# Altium PCB Expansion board.PcbDoc
Units mil, origin at the board's own origin, x right, y up, seen from the top; angles counter-clockwise.
Board outline 3543.31 x 2165.35 mil, 2 copper layers (Top Layer, Bottom Layer); 52 components, 96 nets, 335 pads, 0 vias.
Unrouted connection lines stored in the file: 232.
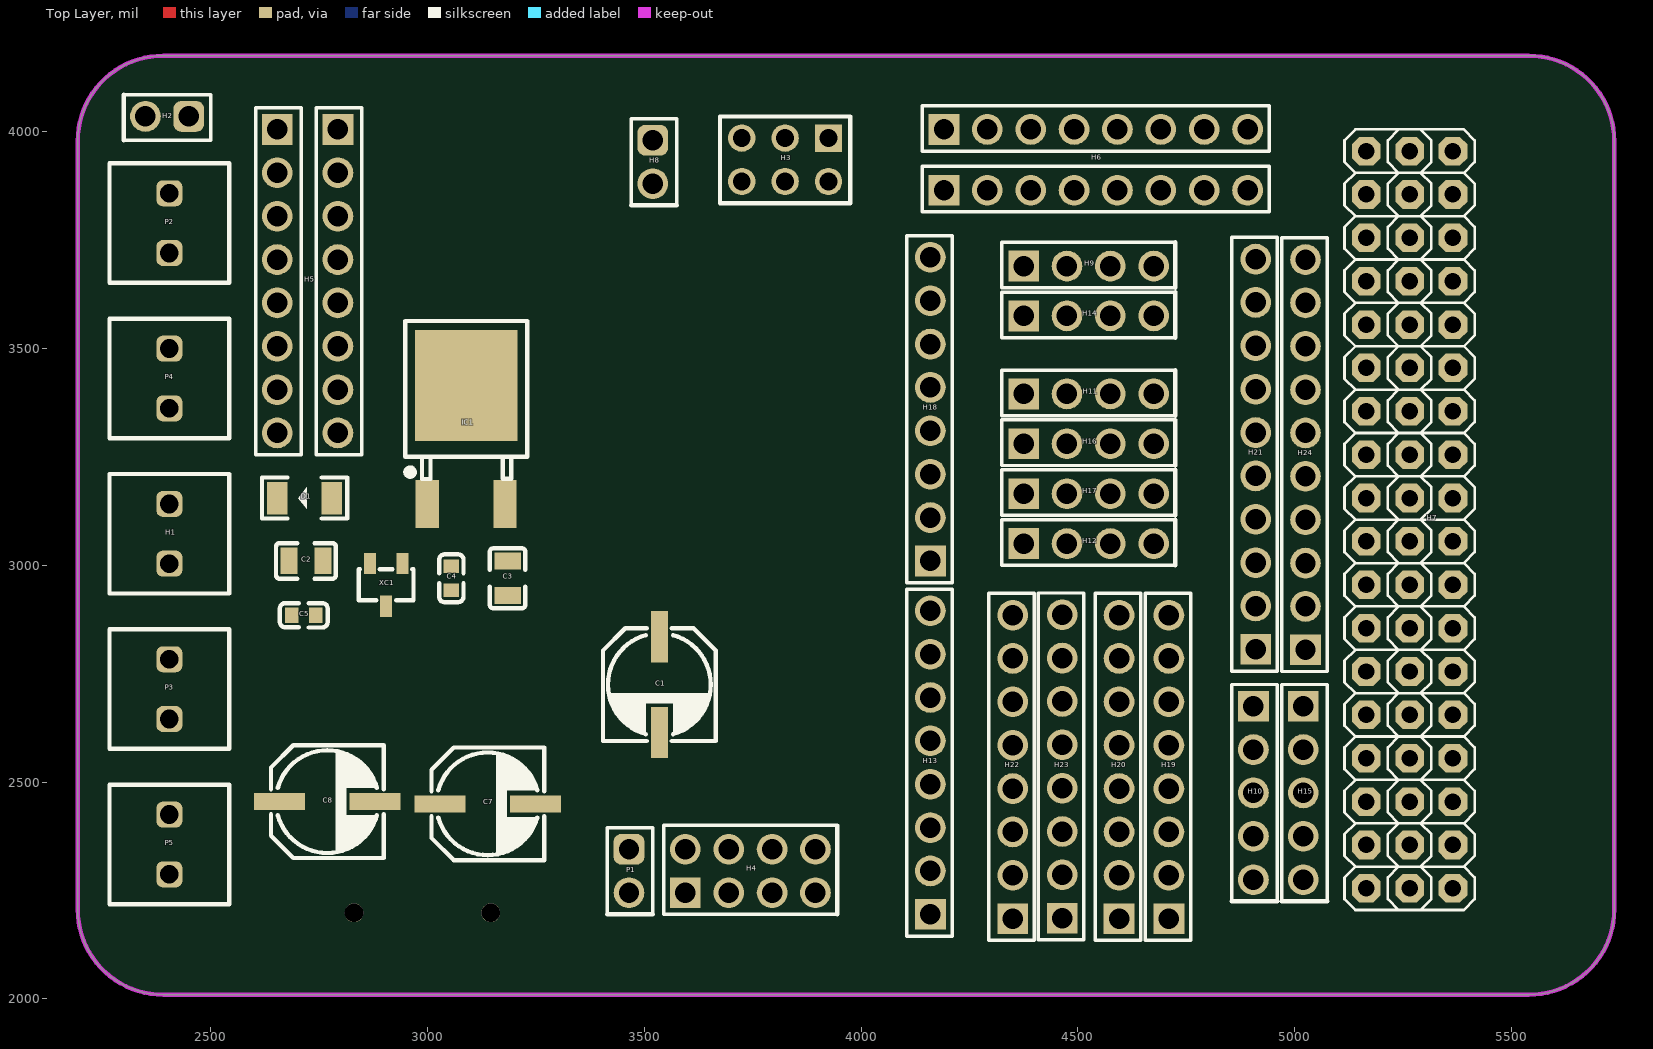
[diagram p0: Top Layer view]
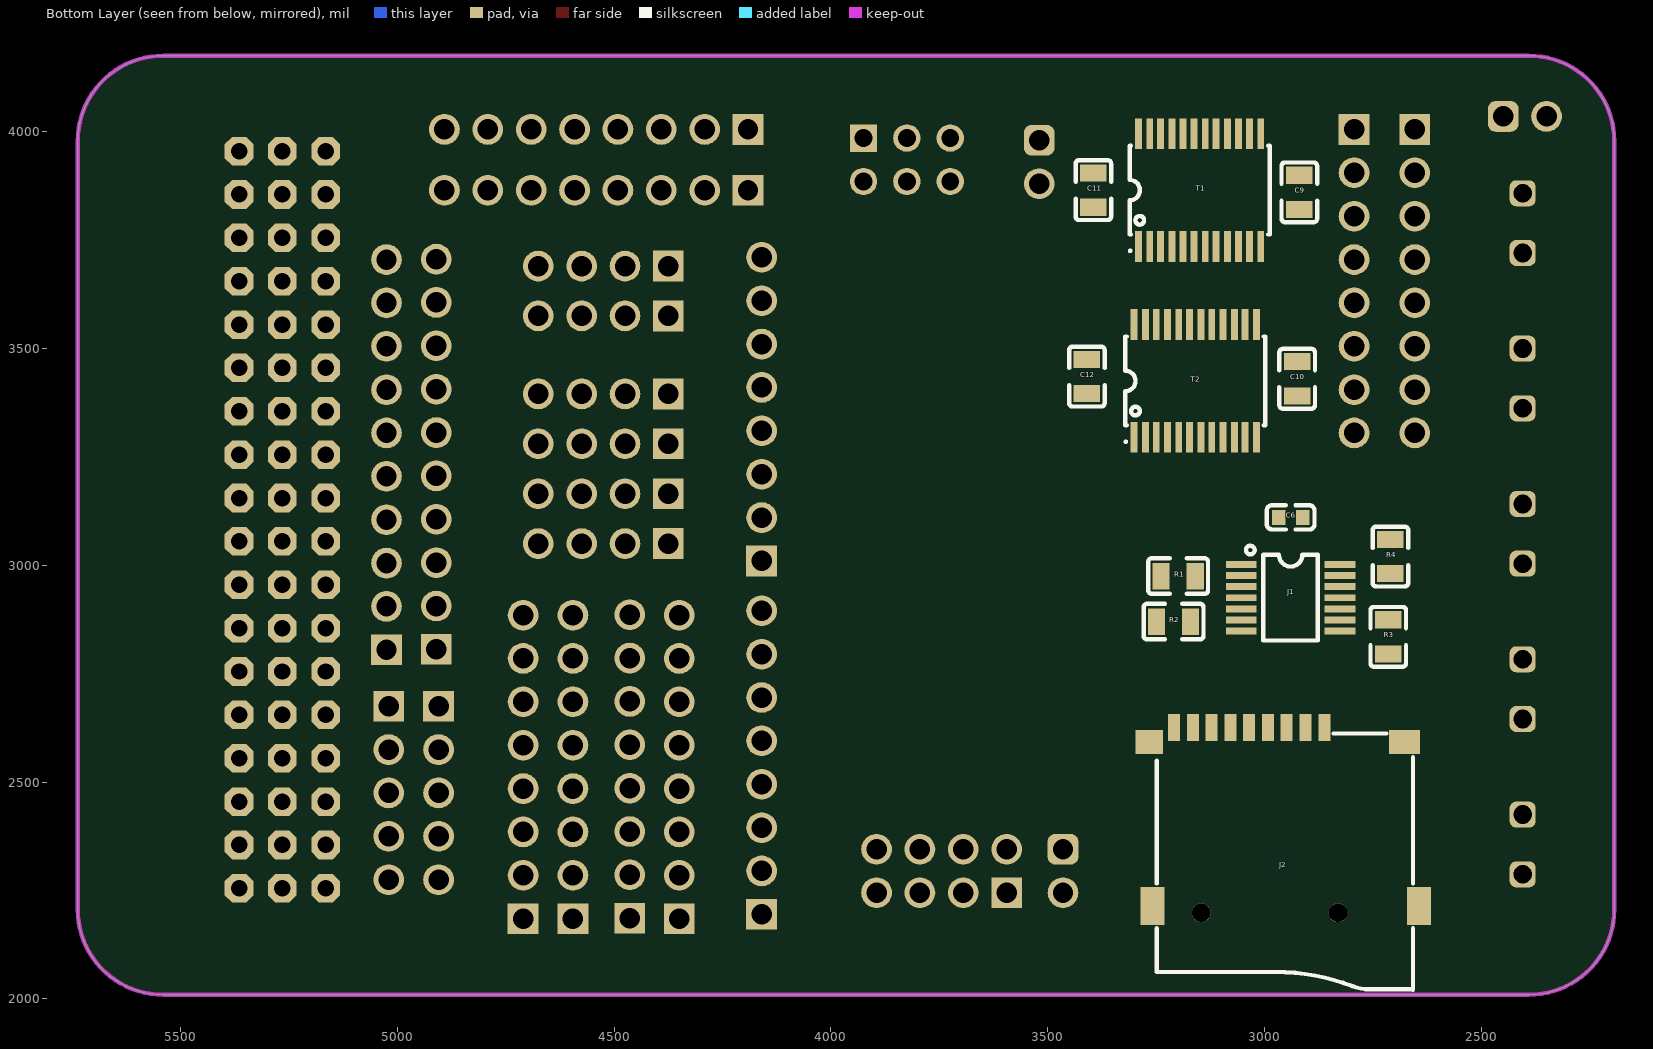
[diagram p1: Bottom Layer view, seen from below]

## Layer stack, top to bottom
Top Solder: solder mask 0.4, Solder Resist, Dk 3.5
Top Layer: signal copper 1.4
Dielectric 1: dielectric 12.6, FR-4, Dk 4.8
Bottom Layer: signal copper 1.4
Bottom Solder: solder mask 0.4, Solder Resist, Dk 3.5

## Board outline
2193.74,2206.47 2193.74,3978.12 cw(c2390.59,3978.12) 2390.59,4174.97 5540.2,4174.97 cw(c5540.2,3978.12) 5737.05,3978.12 5737.05,2206.47 cw(c5540.2,2206.47) 5540.2,2009.62 2390.59,2009.62 cw(c2390.59,2206.47)

## Design rules (kind name [scope] priority, off if disabled: settings)
Clearance [All] p1: gap=5.5 ignorepadtopadclearanceinfootprint=FALSE
PolygonConnect [All] p1: connectstyle=Relief reliefconductorwidth=10 reliefentries=4 polygonreliefangle="90 Angle" airgapwidth=10
RoutingVias [All] p1: holewidth=28 width=50 viastyle="Through Hole" minholewidth=28 minwidth=50 maxholewidth=28 maxwidth=50
SolderMaskExpansion [All] p1: expansion=4 istentingtop=FALSE
Width [All] p1: maxlimit=10 minlimit=10 preferedwidth=10
30 further rules are at their usual default settings.

## Classes and differential pairs
net class PWR: +3V3 +5V GND VIN VIN-B VM

## Components (designator, comment, footprint, x,y, rotation, side; value= is the part's Value field where it differs from the comment)
C1 "47uF" 极性电容 3530.1,2729.05 r270 top
C2 "330nF" 0805 2720,3010 r0 top
C3 "100nF" 0805 3185,2970 r90 top
C4 "1uF" 0603 3055,2970 r270 top
C5 "1uF" 0603 2715,2885 r180 top
C6 "100nF 0603" 0603 2940,3110 r180 bottom
C7 "22uF 25V" 极性电容 3135,2445 r0 top
C8 "22uF 25V" 极性电容 2765,2450 r0 top
C9 "100nF(104) ±10% 50V" 0805 2920,3860 r270 bottom
C10 "100nF(104) ±10% 50V" 0805 2925,3430 r270 bottom
C11 "100nF(104) ±10% 50V" 0805 3395,3865 r90 bottom
C12 "100nF(104) ±10% 50V" 0805 3410,3435 r270 bottom
D1 "二极管" "1206 +-" 2717.01,3155 r180 top
H1 "PWR" 插线端子2P 2405,3141.4 r270 top
H2 "插针" H2 2450,4035 r180 top
H3 "ICSP" H2*3 3825,3935 r180 top
H4 "NRF24l01" H2*4 3745,2295 r90 top
H5 "J2 J3" J2J3 2653.74,4005 r0 top locked
H6 "J5 J4" J5J4 4541.38,3935 r0 top locked
H7 "H3*18" H3*18 5265,3105 r0 top locked
H8 "插针" H2 3520,3980 r270 top
H9 "BT/WIFI" H4 4525,3690 r0 top
H10 "SPI-1" H5 4905,2525 r270 top
H11 "I2C-1" H4 4525,3395 r0 top
H12 "I2C-3" H4 4525,3050 r0 top
H13 "HC-SR04-1" H8 4160,2545 r90 top
H14 "BT/WIFI" H4 4525,3575 r0 top
H15 "SPI-2" H5 5020,2525 r270 top
H16 "I2C-2" H4 4525,3280 r0 top
H17 "I2C-4" H4 4525,3165 r0 top
H18 "HC-SR04-2" H8 4160,3360 r90 top
H19 "模拟输入A0-A7 （8）" H8 4710,2535 r90 top
H20 "8-13+AREF （8）" H8 4595,2535 r90 top
H21 "22-31 (*) （10）" H10 4910,3256 r90 top
H22 "A8-A15 （8）" H8 4350,2535 r90 top
H23 "43-49 + 53 （8）" H8 4464,2536 r90 top
H24 "0-2 + 7 + 14-19 （10）" H10 5025,3255 r90 top
IC1 "78M05 MAX 35V" 78M05 3089.32,3278.19 r90 top
J1 "74VHC125MTC" 74VHC125MTC 2940,2925 r270 bottom
J2 "SD" SD 2955,2420 r270 bottom
P1 "TB6612电源排针" H2 3465,2345 r270 top
P2 "H2-P" 插线端子2P 2405,3857.8 r270 top
P3 "H2-P" 插线端子2P 2405,2783.2 r270 top
P4 "H2-P" 插线端子2P 2405,3499.6 r270 top
P5 "H2-P" 插线端子2P 2405,2425 r270 top
R1 "3.3K" 0805 3199.37,2975 r180 bottom
R2 "3.3K" 0805 3210,2870 r180 bottom
R3 "3.3K" 0805 2715,2835 r270 bottom
R4 "3.3K" 0805 2710,3020 r270 bottom
T1 "TB6612FNG1" TB6612GNG 3150,3865 r180 bottom
T2 "TB6612FNG2" TB6612GNG 3160,3425 r180 bottom
XC1 "XC6206P332" XC6206P332-3.3V 2905,2955 r90 top

## Footprints (in the part's own frame and the unit in brackets; to place one, negate y for a bottom-side part, rotate by r counter-clockwise, add the part's x,y. Pads: shape width x height; smd on the part's side, far side on the other; paste and mask are expansions set on the pad)
74VHC125MTC [mil]
  rect 16x71 smd: 1(-76.77,-114) 2(-51.18,-114) 3(-25.59,-114) 4(0,-114) 5(25.59,-114) 6(51.18,-114) 7(76.77,-114) 8(76.77,114) 9(51.18,114) 10(25.59,114) 11(0,114) 12(-25.59,114) 13(-51.18,114) 14(-76.77,114)
  silkscreen extent -120,-103 98,63, body extent -97,-125 100,127, height 41
78M05 [mm]
  rect 6.5x6 smd: 1(3.475,-0.017)
  rect 2.8x1.35 smd: 2(-3.475,2.275) 3(-3.475,-2.275)
  silkscreen extent -2.01,-3.59 7.24,3.56, body extent -3.76,-3.38 6.34,3.35, height 2.5
0603 [mm]
  rect 0.8x0.9 smd: 1(-0.7,0) 2(0.7,0)
  silkscreen extent -1.4,-0.7 1.4,0.72, body extent -0.8,-0.41 0.8,0.41, height 0.45
0805 [mm]
  rect 1x1.55 smd: 1(-1,0) 2(1,0)
  silkscreen extent -1.75,-1.04 1.75,1.04, body extent -1,-0.62 1,0.62, height 0.5
"1206 +-" [mm] "开关二极管"
  rect 1.2x1.9 smd: 1(1.6,0) 2(-1.6,0)
  silkscreen extent -2.5,-1.2 2.5,1.2, body extent -1.6,-0.8 1.6,0.8, height 0.55
H2 [mm]
  rrect50% 1.8x1.8 hole 1.2: 1(0,0)
  round 1.8 hole 1.2: 2(2.54,0)
  silkscreen extent -1.27,-1.27 3.81,1.4, body extent -1.27,-1.27 3.81,1.27, height 8.54
H2*3 [mm]
  rect 1.6x1.6 hole 1.05: 1(-2.54,-1.27)
  round 1.6 hole 1.05: 2(-2.54,1.27) 3(0,-1.27) 4(0,1.27) 5(2.54,-1.27) 6(2.54,1.27)
  silkscreen extent -3.81,-2.54 3.81,2.54, body extent -3.81,-2.54 3.81,2.54, height 8.54
H2*4 [mm] "NRF24L01"
  rect 1.8x1.8 hole 1.2: 1(-1.27,3.81)
  round 1.8 hole 1.2: 2(1.27,3.81) 3(-1.27,1.27) 4(1.27,1.27) 5(-1.27,-1.27) 6(1.27,-1.27) 7(-1.27,-3.81) 8(1.27,-3.81)
  silkscreen extent -2.54,-5.08 2.67,5.08, body extent -2.54,-5.08 2.54,5.08, height 8.54
H3*18 [mil]
  oct 66x66 hole 38: 1(-100,850) 2(0,850) 3(-100,750) 4(0,750) 5(-100,650) 6(0,650) 7(-100,550) 8(0,550) 9(-100,450) 10(0,450) 11(-100,350) 12(0,350) 13(-100,250) 14(0,250) 15(-100,150) 16(0,150) 17(-100,50) 18(0,50) 19(-100,-50) 20(0,-50) 21(-100,-150) 22(0,-150) 23(-100,-250) 24(0,-250) 25(-100,-350) 26(0,-350) 27(-100,-450) 28(0,-450) 29(-100,-550) 30(0,-550) 31(-100,-650) 32(0,-650) 33(-100,-750) 34(0,-750) 35(-100,-850) 36(0,-850) 37(100,850) 38(100,750) 39(100,650) 40(100,550) 41(100,450) 42(100,350) 43(100,250) 44(100,150) 45(100,50) 46(100,-50) 47(100,-150) 48(100,-250) 49(100,-350) 50(100,-450) 51(100,-550) 52(100,-650) 53(100,-750) 54(100,-850)
  silkscreen extent -150,-900 150,900, body extent -150,-900 150,900, height 336
H4 [mm]
  rect 1.8x1.8 hole 1.2: 1(-3.81,0)
  round 1.8 hole 1.2: 2(-1.27,0) 3(1.27,0) 4(3.81,0)
  silkscreen extent -5.08,-1.27 5.08,1.4, body extent -5.08,-1.27 5.08,1.27, height 8.54
H5 [mm]
  rect 1.8x1.8 hole 1.2: 1(-3.81,0)
  round 1.8 hole 1.2: 2(-1.27,0) 3(1.27,0) 4(3.81,0) 5(6.35,0)
  silkscreen extent -5.08,-1.27 7.62,1.4, body extent -5.08,-1.27 7.62,1.27, height 8.54
H8 [mm]
  rect 1.8x1.8 hole 1.2: 1(-8.89,0)
  round 1.8 hole 1.2: 2(-6.35,0) 3(-3.81,0) 4(-1.27,0) 5(1.27,0) 6(3.81,0) 7(6.35,0) 8(8.89,0)
  silkscreen extent -10.16,-1.27 10.16,1.4, body extent -10.16,-1.27 10.16,1.27, height 8.54
H10 [mm]
  rect 1.8x1.8 hole 1.2: 1(-11.43,0)
  round 1.8 hole 1.2: 2(-8.89,0) 3(-6.35,0) 4(-3.81,0) 5(-1.27,0) 6(1.27,0) 7(3.81,0) 8(6.35,0) 9(8.89,0) 10(11.43,0)
  silkscreen extent -12.7,-1.27 12.7,1.4, body extent -12.7,-1.27 12.7,1.27, height 8.54
J2J3 [mm]
  rect 1.8x1.8 hole 1.2: 1(0,0) 9(3.556,0)
  round 1.8 hole 1.2: 2(0,-2.54) 3(0,-5.08) 4(0,-7.62) 5(0,-10.16) 6(0,-12.7) 7(0,-15.24) 8(0,-17.78) 10(3.556,-2.54) 11(3.556,-5.08) 12(3.556,-7.62) 13(3.556,-10.16) 14(3.556,-12.7) 15(3.556,-15.24) 16(3.556,-17.78)
  silkscreen extent -1.27,-19.05 4.95,1.27, body extent -1.21,-19.05 4.95,1.27, height 8.54
J5J4 [mm]
  rect 1.8x1.8 hole 1.2: 17(-8.89,1.778) 25(-8.89,-1.778)
  round 1.8 hole 1.2: 18(-6.35,1.778) 19(-3.81,1.778) 20(-1.27,1.778) 21(1.27,1.778) 22(3.81,1.778) 23(6.35,1.778) 24(8.89,1.778) 26(-6.35,-1.778) 27(-3.81,-1.778) 28(-1.27,-1.778) 29(1.27,-1.778) 30(3.81,-1.778) 31(6.35,-1.778) 32(8.89,-1.778)
  silkscreen extent -10.16,-3.05 10.16,3.17, body extent -10.16,-3.05 10.16,3.05, height 8.54
SD [mil] "TF"
  rect 63x27.6 smd: 1(-205.77,92.52) 2(-205.77,49.21) 3(-205.77,5.91) 4(-205.77,-37.4) 5(-205.77,-80.71) 6(-205.77,-124.01) 7(-205.77,-167.32) 8(-205.77,-210.63) 9(-205.77,-253.94)
  rect 55.1x63 smd: 10(-172.19,-311.02)
  rect 86.6x55.1 smd: 11(205.77,-303.15) 12(205.77,311.02)
  rect 55.1x70.9 smd: 13(-172.17,277.58)
  round 43.31 hole 43.31 unplated: ""(221.51,-190.94) ""(221.51,124.02)
  silkscreen extent -192,-294 399,297, body extent -210,-310 471,324, height 73
TB6612GNG [mil]
  rect 16x71 smd: 1(-141,-129.92) 2(-115,-129.92) 3(-90,-129.92) 4(-64,-129.92) 5(-38,-129.92) 6(-13,-129.92) 7(13,-129.92) 8(38,-129.92) 9(64,-129.92) 10(90,-129.92) 11(115,-129.92) 12(141,-129.92) 13(141,129.92) 14(115,129.92) 15(90,129.92) 16(64,129.92) 17(38,129.92) 18(13,129.92) 19(-13,129.92) 20(-38,129.92) 21(-64,129.92) 22(-90,129.92) 23(-115,129.92) 24(-141,129.92)
  silkscreen extent -161,-140 161,102, body extent -165,-155 165,156, height 74
XC6206P332-3.3V [mm]
  rect 1.25x0.7 smd: 1(1.25,-0.95) 2(1.25,0.95) 3(-1.25,0)
  silkscreen extent -0.9,-1.6 0.9,1.6, body extent -1.4,-1.5 1,1.5, height 1.05
插线端子2P [mil]
  rrect50% 60x60 hole 43.31: 1(0,0) 2(137.8,0)
  silkscreen extent -69,-138 207,138, body extent -82,-130 207,165, height 398
极性电容 [mm]
  rect 3x1 smd: 1(-2.691,0.124) 2(2.909,0.124)
  silkscreen extent -3.19,-3.18 3.41,3.42, body extent -3.44,-3.17 3.56,3.43, height 7.75

## Part data
C1 C7 C8: library part "Cap Pol极性电容", "极性电容器", LatestRevisionDate=17-Jul-2002, LatestRevisionNote="Re-released for DXP Platform.", PackageDescription="Polarized Capacitor (Radial); 2 Leads", PackageReference=RB7.6-15, Published=8-Jun-2000, Publisher="Altium Limited"
C2 C3 C6: library part CAP-N
C4 C5: library part Cap, "极性电容器", LatestRevisionDate=17-Jul-2002, LatestRevisionNote="Re-released for DXP Platform.", PackageDescription="Polarized Capacitor (Radial); 2 Leads", PackageReference=RB7.6-15, Published=8-Jun-2000, Publisher="Altium Limited"
C9 C10 C11 C12: library part CAP-0805
H1: library part H2
H2 H8: library part H2, "排针类"
H3: library part H3*2
H4: library part "Header 2*4"
H5: library part J2-3
H6: library part J5-4
H9 H11 H12 H14 H16 H17: library part H4
H10 H15: library part H5
H13 H18 H19 H20 H22 H23: library part H8
H21 H24: library part H10
IC1: library part 78M05-5.0V, "MAX 18V"
J1: library part 74VHC125MCT
P1: library part H2-P, "排管类"
P2 P3 P4 P5: "排管类"
R1 R2 R3 R4: library part RES
T1 T2: library part TB6612
XC1: "3.3V限性稳压器"

## Nets (pads, with @x,y where several pads share a name; then routed paths per layer and width w, separated by ;. In a path a pad name is that pad's centre, name@x,y a point inside that pad or via, vN(x,y) a via of type N, cw(c..) or ccw(c..) an arc to the next point about the centre after c; other vN are vias at no path point)
1-AO1: P2.1 T1.1 T1.2
1-AO2: P2.2 T1.5 T1.6
1-BO1: P4.1 T1.11 T1.12
1-BO2: P4.2 T1.7 T1.8
2-AO1: P3.1 T2.1 T2.2
2-AO2: P3.2 T2.5 T2.6
2-BO1: P5.1 T2.11 T2.12
2-BO2: P5.2 T2.7 T2.8
+3V3: C1.1 C5.1 C6.1 H4.2 H6.20 J1.14 J2.4 XC1.2
+5V: C3.2 C4.1 H3.2 H6.18 H6.21 H7.1 H7.2 H8.2 H9.1 H10.1 H11.2 H12.2 H13.4 H13.8 H14.1 H15.1 H16.2 H17.2 H18.4 H18.8 IC1.3 XC1.3
AREF: H7.47 H20.8
DTR: H3.5 H6.19
GND: C1.2 C2.1 C3.1 C4.2 C5.2 C6.2 C7.2 C8.2 C9.2 C10.2 C11.1 C12.1 H1.2 H3.6 H4.1 H6.22 H6.23 H7.35 H7.36 H7.48 H9.2 H10.2 H11.1 H12.1 H13.1 H13.5 H14.2 H15.2 H16.1 H17.1 H18.1 H18.5 H20.7 IC1.1 J1.1 J1.4 J1.7 J1.10 J1.13 J2.6 J2.10 J2.11 J2.12 J2.13 T1.3 T1.4 T1.9 T1.10 T1.18 T2.3 T2.4 T2.9 T2.10 T2.18 XC1.1
NetC11_2: C11.2 C12.2 H8.1 T1.20 T2.20
NetD1_1: D1.1 H1.1
NetJ1_2: J1.2 R1.2
NetJ1_3: J1.3 J2.3
NetJ1_5: J1.5 R2.2
NetJ1_6: J1.6 J2.5
NetJ1_8: J1.8 J2.2
NetJ1_9: J1.9 R3.1
NetJ1_12: J1.12 R4.1
NetJ2_7: J2.7 R4.2
PA0: H4.3 H7.3 H21.1
PA1: H4.4 H7.4 H21.2
PA2: H7.5 H13.2 H21.3
PA3: H7.6 H13.3 H21.4
PA4: H7.7 H13.6 H21.5
PA5: H7.8 H13.7 H21.6
PA6: H7.9 H18.2 H21.7
PA7: H7.10 H18.3 H21.8
PB0: H7.34 H23.8
PB1: H3.3 H4.5 H7.33 H10.3 H15.3 R2.1
PB2: H3.4 H4.6 H7.32 H10.4 H15.4 R1.1
PB3: H3.1 H4.7 H7.31 H10.5 H15.5 J1.11
PB4: H7.52 H20.3
PB5: H7.51 H20.4
PB6: H7.50 H20.5
PB7: H7.49 H20.6
PC0: H7.18 T2.19
PC1: H7.17 T1.19
PC2: H7.16 T1.16
PC3: H7.15 T1.17
PC4: H7.14 T1.22
PC5: H7.13 T1.21
PC6: H7.12 H18.7 H21.10
PC7: H7.11 H18.6 H21.9
PD7: H7.19 T2.22
PE0: H5.1 H24.1
PE1: H5.2 H24.2
PE3: H5.6 T2.23
PE4: H5.3 H24.3
PE5: H5.4 T1.23
PF0: H6.25 H19.1
PF1: H6.26 H19.2
PF2: H6.27 H19.3
PF3: H6.28 H19.4
PF4: H6.29 H19.5
PF5: H6.30 H19.6
PF6: H6.31 H19.7
PF7: H6.32 H19.8
PG0: H7.22 T2.16
PG1: H7.21 T2.17
PG2: H7.20 T2.21
PG5: H5.5 T1.15
PH3: H5.7 T2.15
PH4: H5.8 H24.4
PH5: H7.54 H20.1
PH6: H7.53 H20.2
PK0: H7.37 H22.1
PK1: H7.38 H22.2
PK2: H7.39 H22.3
PK3: H7.40 H22.4
PK4: H7.41 H22.5
PK5: H7.42 H22.6
PK6: H7.43 H22.7
PK7: H7.44 H22.8
PL0: H7.30 H23.7
PL1: H7.29 H23.6
PL2: H7.28 H23.5
PL3: H7.27 H23.4
PL4: H7.26 H23.3
PL5: H7.25 H23.2
PL6: H7.24 H23.1
PL7: H7.23 R3.2
RXD1: H5.11 H9.3 H24.10
RXD2: H5.13 H14.3 H24.8
RXD3: H5.15 H24.6
SCL: H5.9 H7.45 H11.4 H12.4 H16.4 H17.4
SDA: H5.10 H7.46 H11.3 H12.3 H16.3 H17.3
TXD1: H5.12 H9.4 H24.9
TXD2: H5.14 H14.4 H24.7
TXD3: H5.16 H24.5
VIN: C2.2 D1.2 H2.2 IC1.2 P1.1
VIN-B: H2.1 H6.24
VM: C7.1 C8.1 C9.1 C10.1 P1.2 T1.13 T1.14 T1.24 T2.13 T2.14 T2.24
pads on no net: H4.8 H6.17 J2. J2.1 J2.8 J2.9

## Keep-outs
Keep-Out Layer:
  the board outline again, w10